# Allegro board gps_breakout.brd
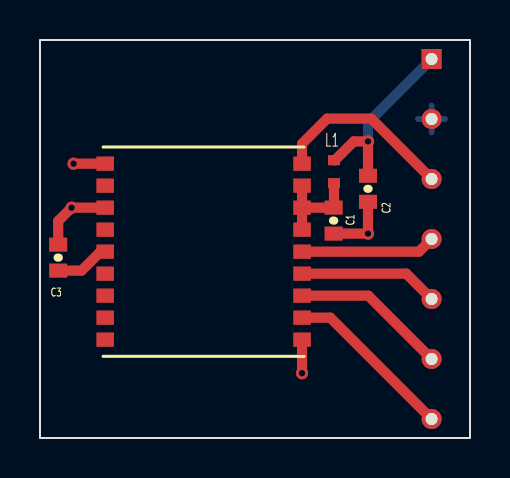
[diagram p0: board, top side]
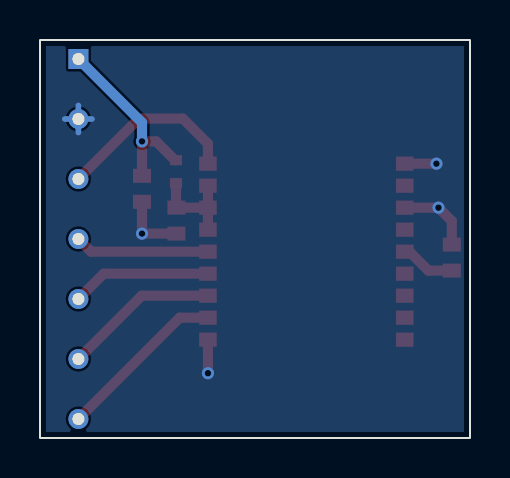
[diagram p1: board, bottom side, seen from below]

Outline 21.5 x 19.9 mm; copper layers: TOP, BOTTOM. Coordinates in mm from the lower left corner of the outline.
Outline path: rectangle 0,0 21.5,19.9

## Design rules (mm)
constraint set DEFAULT: min track width 0.281

## Placement (name value [footprint] x y rotation side)
C1  56pF  [0402-CAP]  14.68 10.87 90 top
C2  10nF  [0402-CAP]  16.4 12.46 90 top
C3  56pF  [0402-CAP]  0.91 9.02 90 top
JP1  gps_breakout  [GPS_BREAKOUT]  19.58 9.95 0 top
L1  27nH  [0402-IND]  14.7 13.32 270 top
NOREF  -  []  -51.27 -110.57 0 top
U1  TESEO-LIV3F  [LCC18_9P7X10P1_STM]  8.18 9.32 180 top

## Library data of the parts
C1-C3 = CAP NP
JP1 = gps_breakout
L1 = INDUCTOR
U1 = TESEO-LIV3F

## Footprints (pads in the part's own frame, mm; a bottom-side part is the same pattern mirrored in y, then rotated)
0402-CAP
  rect 0.7x0.9 smd: 1(-0.65,0) 2(0.65,0)
0402-IND
  rect 0.5x0.6 smd: 1(-0.57,0) 2(0.58,0)
GPS_BREAKOUT
  rect 1x1 hole 0.6: 1(0,9)
  round 1 hole 0.6: 2(0,6) 3(0,3) 4(0,0) 5(0,-3) 6(0,-6) 7(0,-9)
LCC18_9P7X10P1_STM
  rect 0.876x0.711 smd: 1(-4.921,4.4) 2(-4.921,3.3) 3(-4.921,2.2) 4(-4.921,1.1) 5(-4.921,0) 6(-4.921,-1.1) 7(-4.921,-2.2) 8(-4.921,-3.3) 9(-4.921,-4.4) 10(4.921,-4.4) 11(4.921,-3.3) 12(4.921,-2.2) 13(4.921,-1.1) 14(4.921,0) 15(4.921,1.1) 16(4.921,2.2) 17(4.921,3.3) 18(4.921,4.4)

## Nets
GND: C1.1 C2.1 C3.2 JP1.2 U1.1 U1.10 U1.12
VCC: C2.2 JP1.1 L1.1
1PPS: JP1.5 U1.4
SYS_RSTN: JP1.3 U1.9
UART_RX: JP1.6 U1.3
UART_TX: JP1.7 U1.2
WAKE_UP: JP1.4(WAKEUP) U1.5(WAKE-UP)
N00207: C1.2 L1.2 U1.6 U1.7 U1.8
N00492: C3.1 U1.14

Pads without a net: U1 11 13 15 16 17 18

## Via types
v1: diameter 0.61, hole 0.33, TOP to BOTTOM, 5 vias

## Routing (per net, layer and track width the routed paths; a pad name or vN(x,y) marks a point on that pad's centre or on a via; arc(x,y) is an arc through that point)
GND: length 13.1
  TOP w0.508: U1.1 v1(13.1,3.24) ; U1.12 v1(1.58,11.52) 0.91,10.85 C3.2 ; U1.10 v1(1.68,13.72) ; C2.1 v1(16.4,10.22) C1.1
  BOTTOM w0.281: 18.9,15.95 JP1.2 ; JP1.2 20.26,15.95 ; JP1.2 19.58,15.27 ; JP1.2 19.58,16.63
VCC: length 9.2
  TOP w0.508: C2.2 v1(16.4,14.83) 15.69,14.83 14.75,13.89 L1.1
  BOTTOM w0.508: v1(16.4,14.83) 16.4,15.77 JP1.1
1PPS: length 7
  TOP w0.508: U1.4 18.31,8.22 JP1.5
SYS_RSTN: length 9.2
  TOP w0.508: U1.9 13.1,14.71 14.36,15.97 16.56,15.97 JP1.3
UART_RX: length 7.8
  TOP w0.508: U1.3 16.41,7.12 JP1.6
UART_TX: length 8.6
  TOP w0.508: JP1.7 14.51,6.02 U1.2
WAKE_UP: length 6.7
  TOP w0.508: JP1.4 18.95,9.32 U1.5
N00207: length 5
  TOP w0.508: U1.7 U1.6 ; U1.7 U1.8 ; U1.7 14.68,11.52 C1.2 14.7,11.54 L1.2
N00492: length 2.7
  TOP w0.508: U1.14 3.03,9.32 2.08,8.37 C3.1

## Copper pours and planes (outline as drawn; the poured copper is in the pictures)
GND on BOTTOM: 0.3,19.6 21.2,19.6 21.2,0.3 0.3,0.3

## Text on the board
XSECTION_CHART: *  SURFACE | L1 TOP CONDUCTOR | *  DIELECTRIC | L2 BOTTOM CONDUCTOR | DESIGN CROSS SECTION CHART | ___________________________ | TOTAL THICKNESS 0.26416 MM | 1-2
PAGE_OUTLINE: FIGURE | FINISHED_SIZE | 0.3302 | 0.5999 | DRILL CHART: TOP to BOTTOM | ALL UNITS ARE IN MILLIMETERS | TOLERANCE_DRILL | +0.0/-0.0 | +0.05/-0.05 | PLATED | QTY | 7
